# EAGLE board board04-switch-01 (EAGLE 7.5.0)
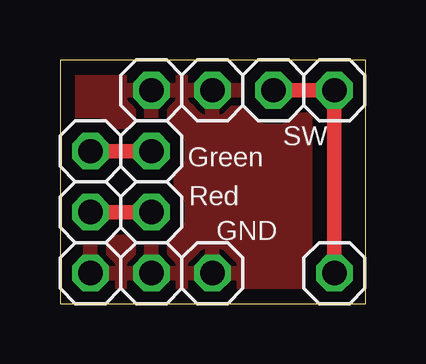
[diagram p0: board, top side]
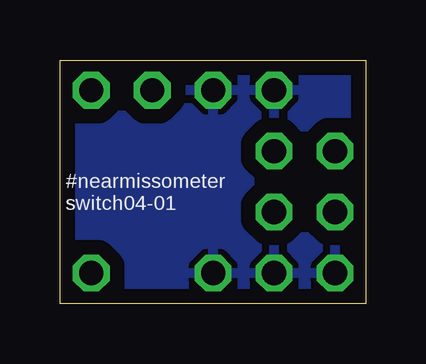
[diagram p1: board, bottom side, seen from below]

Size 12.73 x 10.15 mm. Coordinates in mm from the lower left corner, seen from the top.
Outline: 0,0 12.73,0 12.73,10.15 0,10.15 0,0
Copper layers (1*16): Top 0.0356mm / dielectric 1.5011mm / Bottom 0.0356mm
Design rules "LaenPCBOrder": minimum track width 6mil, minimum drill 13mil, track to track 6mil, track to pad 6mil, pad to pad 6mil, via to via 6mil, smd to smd 6mil, copper to edge 15mil, drill to drill 6mil, minimum pad ring 7mil, minimum via ring 7mil, stop-mask expansion 3mil, vias tented up to drill 0mil, thermal gap 10mil

## Footprints (pad centres in the part's own frame; a part is rotated, then mirrored left to right if it is on the bottom)
1X01 = drill 1.016 octagon: 1 0,0

## Placement (x,y rotation side)
A1  [1X01]  1.27,1.27 0 top
A4  [1X01]  1.27,3.81 0 top
A6  [1X01]  11.43,1.27 0 top
A7  [1X01]  1.27,6.35 0 top
A19  [1X01]  3.81,3.81 0 top
A20  [1X01]  6.35,1.27 0 top
A23  [1X01]  6.35,8.89 0 top
A24  [1X01]  3.81,6.35 0 top
JP3  [1X01]  11.43,8.89 0 top
JP4  [1X01]  8.89,8.89 0 top
JP5  [1X01]  3.81,8.89 0 top
JP7  [1X01]  3.81,1.27 0 top

## Library data of the parts
A1 A4 A6 A7 A19 A20 A23 A24 JP3-JP5 JP7 = pinhead

## Nets
GND: A1.1 A20.1 A23.1 JP5.1 JP7.1
N$3: A4.1 A19.1
N$11: A7.1 A24.1
N$14: A6.1 JP3.1 JP4.1

## Tracks (layer width: path | path; a pad name or v marks a point on that pad's centre or on a via)
GND
  pour Top (isolate 0.61): 13.97,12.7 13.97,-1.27 -1.27,-1.27 -1.27,12.7
  pour Bottom (isolate 0.61): 16.51,15.24 16.51,-1.27 -1.27,-1.27 -1.27,15.24
N$3
  Top 0.61: A19.1 A4.1
N$11
  Top 0.61: A24.1 A7.1
N$14
  Top 0.61: JP4.1 JP3.1 A6.1

## Text on the board
tNames: SW | Green | Red | GND
bNames: #nearmissometer / switch04-01